# Altium PCB PCB2.PcbDoc (part 1 of 4)
Units mm, origin at the board's own origin, x right, y up, seen from the top; angles counter-clockwise.
Board outline 94 x 91 mm, 2 copper layers (Top Layer, Bottom Layer); 387 components, 398 nets, 1559 pads, 0 vias.
Unrouted connection lines stored in the file: 857.
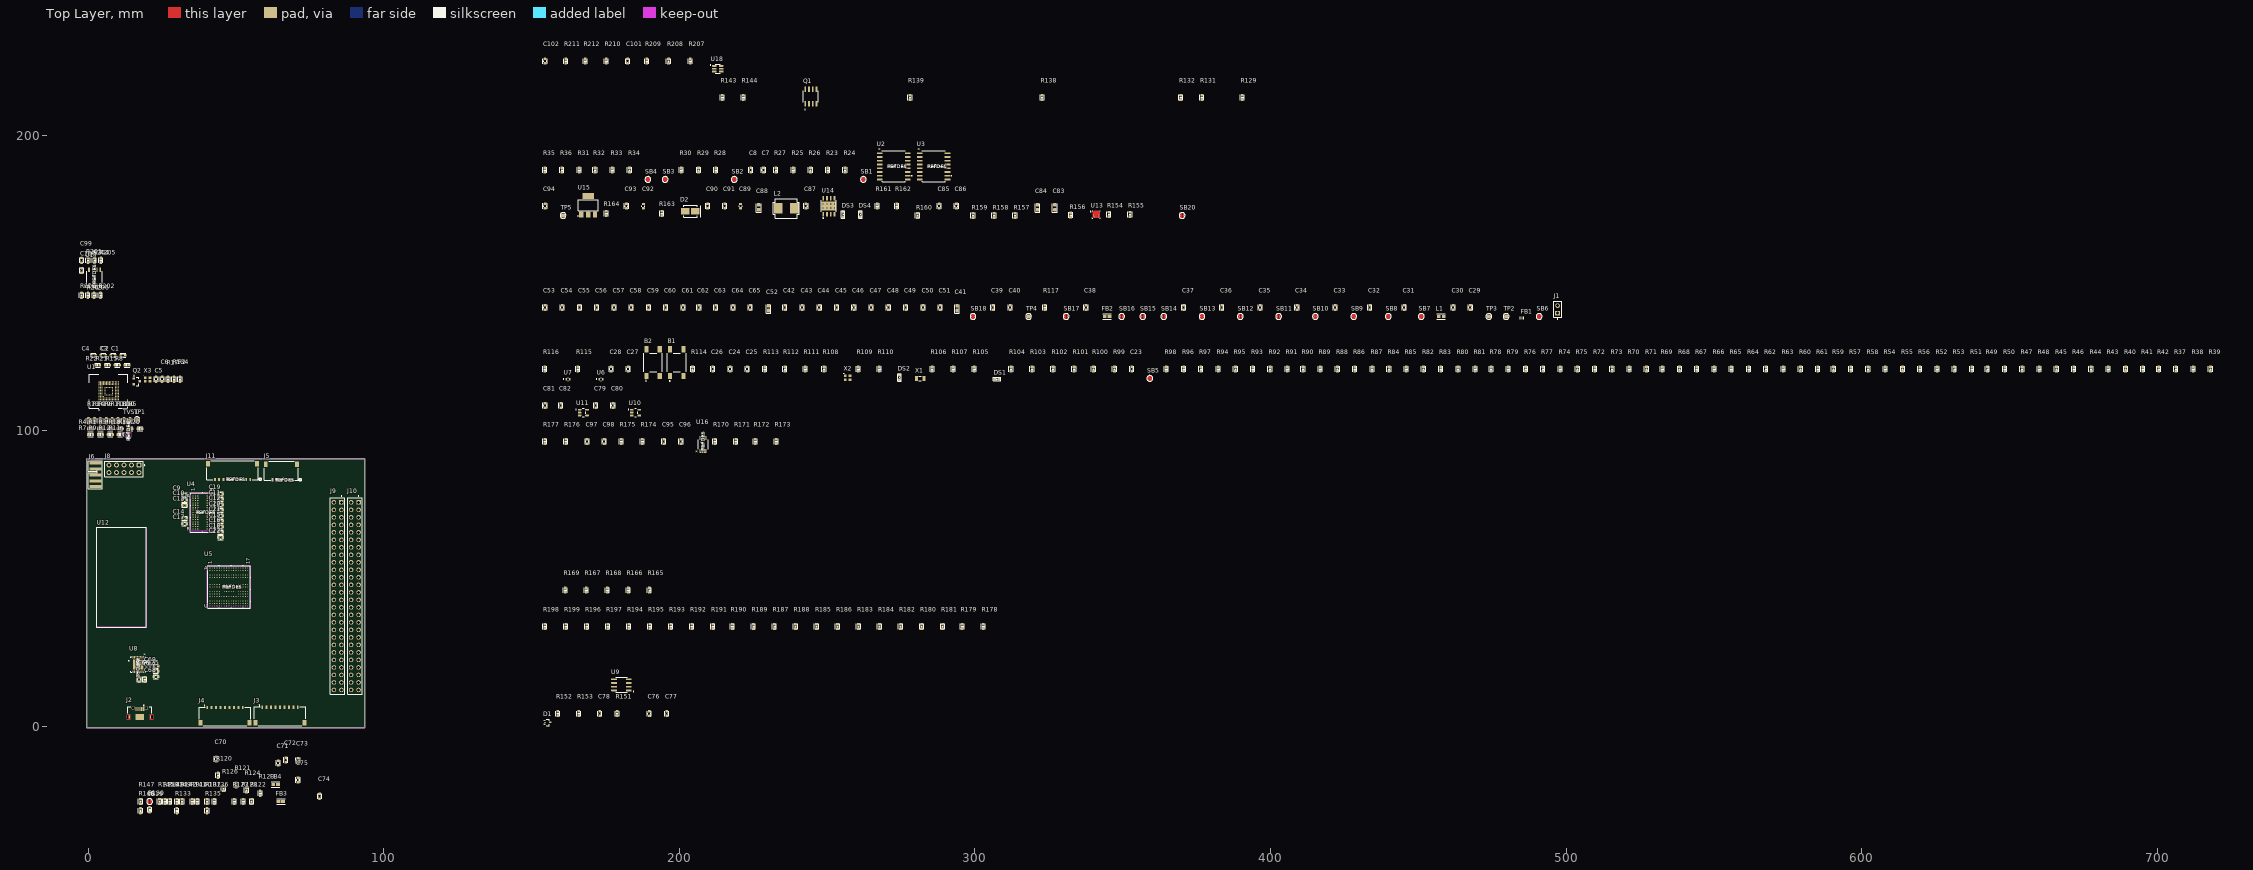
[diagram p0: Top Layer view]
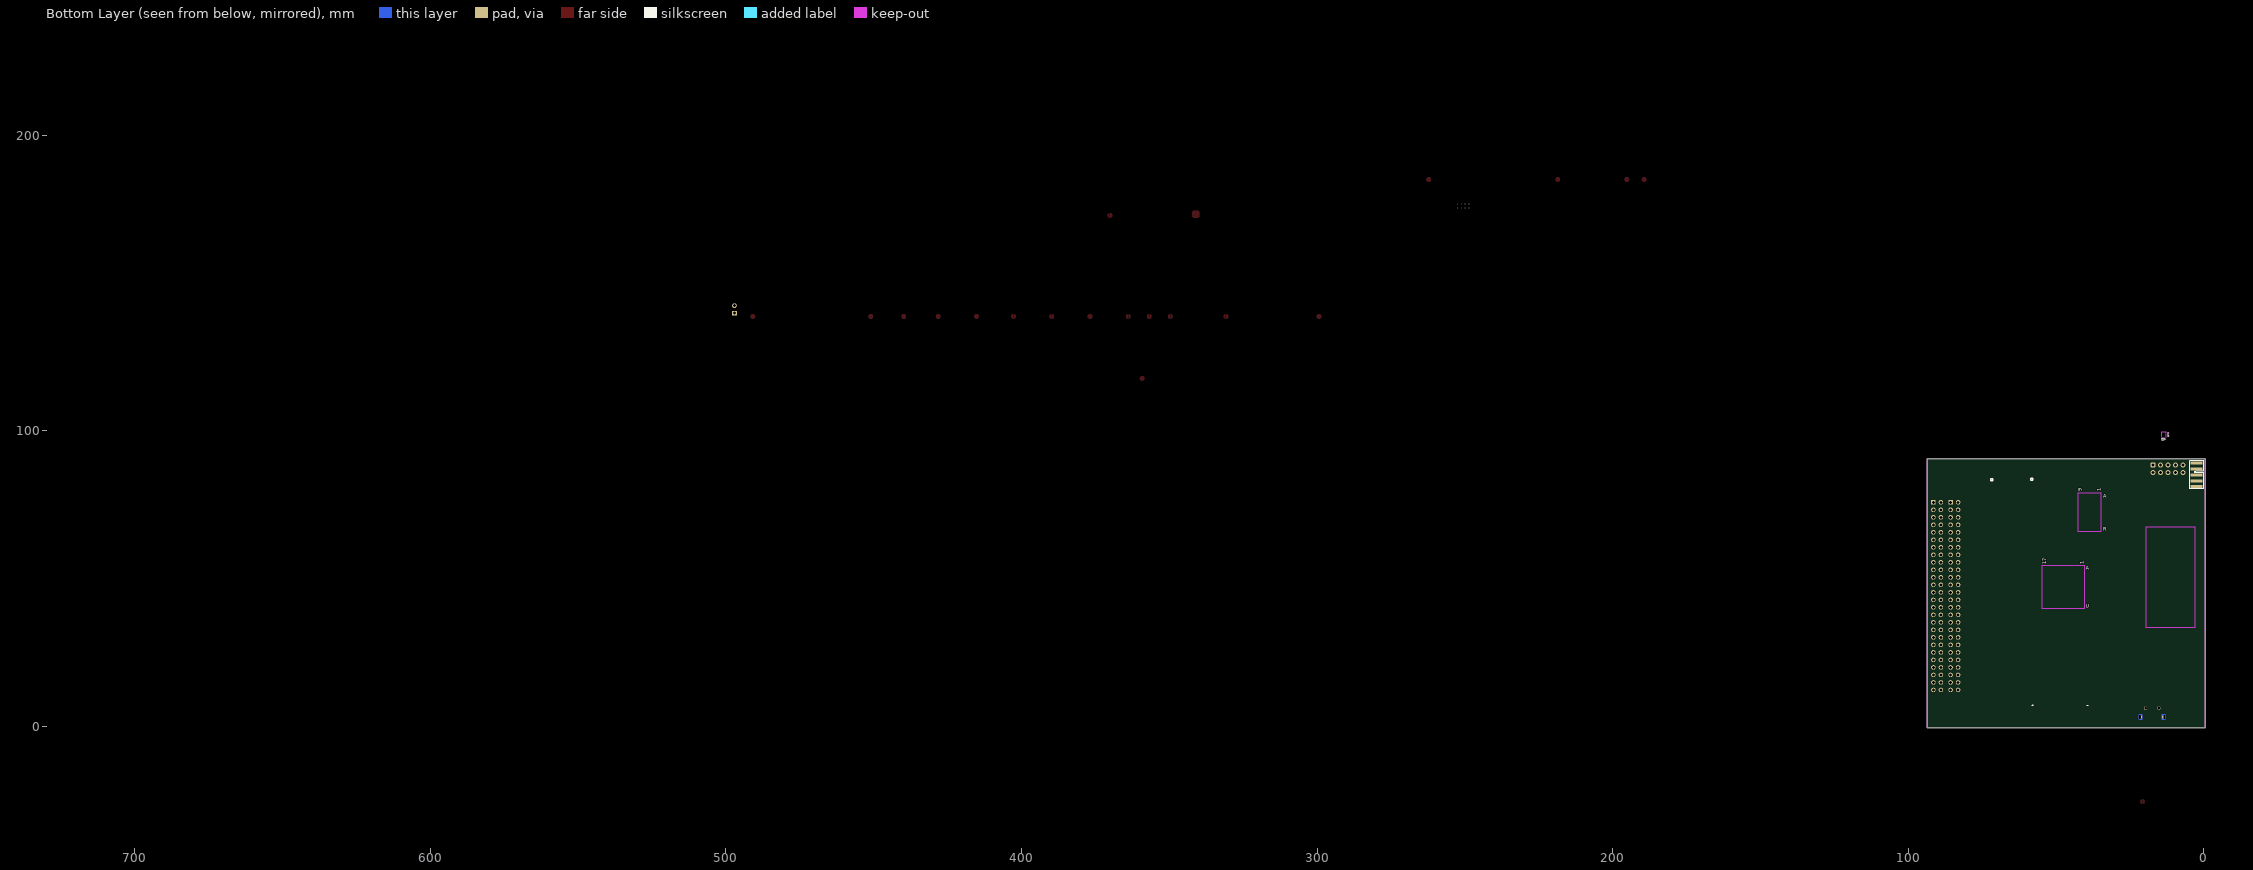
[diagram p1: Bottom Layer view, seen from below]

## Layer stack, top to bottom
Top Solder: solder mask 0.0102, Solder Resist, Dk 3.5
Top Layer: signal copper 0.0356
Dielectric 1: dielectric 0.32, FR-4, Dk 4.8
Bottom Layer: signal copper 0.0356
Bottom Solder: solder mask 0.0102, Solder Resist, Dk 3.5

## Board outline
-0.5,-0.5 -0.5,90.5 93.5,90.5 93.5,-0.5

## Design rules (kind name [scope] priority, off if disabled: settings)
Clearance [All] p1: gap=0.254 ignorepadtopadclearanceinfootprint=FALSE
DiffPairsRouting [All] p1: maxlimit=0.254 minlimit=0.254 mostfreqgap=0.254 toplayer_minwidth=0.381 toplayer_maxwidth=0.381 toplayer_prefwidth=0.381 bottomlayer_minwidth=0.381 bottomlayer_maxwidth=0.381 bottomlayer_prefwidth=0.381 maxuncoupledlength=12.7
MatchedLengths "Schematic Matched Net Lengths_21" [InNetClass('SDRAM_A[0..11]')] p1: tolerance=2.54 checknetsindiffpair=FALSE checkdiffpairvsdiffpair=TRUE checkxsignals=TRUE checkothers=TRUE
MatchedLengths "Schematic Matched Net Lengths_20" [InNetClass('SDRAM_D[0..31]')] p2: tolerance=2.54 checknetsindiffpair=FALSE checkdiffpairvsdiffpair=TRUE checkxsignals=TRUE checkothers=TRUE
MatchedLengths "Schematic Matched Net Lengths_19" [InNet('QSPI_BK1_IO3')] p3: tolerance=2.54 checknetsindiffpair=FALSE checkdiffpairvsdiffpair=TRUE checkxsignals=TRUE checkothers=TRUE
MatchedLengths "Schematic Matched Net Lengths_18" [InNet('QSPI_BK2_IO0')] p4: tolerance=2.54 checknetsindiffpair=FALSE checkdiffpairvsdiffpair=TRUE checkxsignals=TRUE checkothers=TRUE
MatchedLengths "Schematic Matched Net Lengths_17" [InNet('SDRAM_SDNCAS')] p5: tolerance=2.54 checknetsindiffpair=FALSE checkdiffpairvsdiffpair=TRUE checkxsignals=TRUE checkothers=TRUE
MatchedLengths "Schematic Matched Net Lengths_16" [InNet('QSPI_BK2_IO2')] p6: tolerance=2.54 checknetsindiffpair=FALSE checkdiffpairvsdiffpair=TRUE checkxsignals=TRUE checkothers=TRUE
MatchedLengths "Schematic Matched Net Lengths_15" [InNet('SDRAM_SDNE1')] p7: tolerance=2.54 checknetsindiffpair=FALSE checkdiffpairvsdiffpair=TRUE checkxsignals=TRUE checkothers=TRUE
MatchedLengths "Schematic Matched Net Lengths_14" [InNet('SDIO1_CMD')] p8: tolerance=2.54 checknetsindiffpair=FALSE checkdiffpairvsdiffpair=TRUE checkxsignals=TRUE checkothers=TRUE
MatchedLengths "Schematic Matched Net Lengths_13" [InNet('QSPI_BK2_IO3')] p9: tolerance=2.54 checknetsindiffpair=FALSE checkdiffpairvsdiffpair=TRUE checkxsignals=TRUE checkothers=TRUE
MatchedLengths "Schematic Matched Net Lengths_12" [InNet('QSPI_BK1_NCS')] p10: tolerance=2.54 checknetsindiffpair=FALSE checkdiffpairvsdiffpair=TRUE checkxsignals=TRUE checkothers=TRUE
MatchedLengths "Schematic Matched Net Lengths_11" [InNet('SDRAM_SDCKE1')] p11: tolerance=2.54 checknetsindiffpair=FALSE checkdiffpairvsdiffpair=TRUE checkxsignals=TRUE checkothers=TRUE
MatchedLengths "Schematic Matched Net Lengths_10" [InNet('QSPI_BK1_IO0')] p12: tolerance=2.54 checknetsindiffpair=FALSE checkdiffpairvsdiffpair=TRUE checkxsignals=TRUE checkothers=TRUE
MatchedLengths "Schematic Matched Net Lengths_9" [InNet('QSPI_BK2_NCS')] p13: tolerance=2.54 checknetsindiffpair=FALSE checkdiffpairvsdiffpair=TRUE checkxsignals=TRUE checkothers=TRUE
MatchedLengths "Schematic Matched Net Lengths_8" [InNet('SDIO1_CK')] p14: tolerance=2.54 checknetsindiffpair=FALSE checkdiffpairvsdiffpair=TRUE checkxsignals=TRUE checkothers=TRUE
MatchedLengths "Schematic Matched Net Lengths_7" [InNet('QSPI_BK1_IO2')] p15: tolerance=2.54 checknetsindiffpair=FALSE checkdiffpairvsdiffpair=TRUE checkxsignals=TRUE checkothers=TRUE
MatchedLengths "Schematic Matched Net Lengths_6" [InNet('QSPI_BK1_IO1')] p16: tolerance=2.54 checknetsindiffpair=FALSE checkdiffpairvsdiffpair=TRUE checkxsignals=TRUE checkothers=TRUE
MatchedLengths "Schematic Matched Net Lengths_5" [InNet('QSPI_CLK')] p17: tolerance=2.54 checknetsindiffpair=FALSE checkdiffpairvsdiffpair=TRUE checkxsignals=TRUE checkothers=TRUE
MatchedLengths "Schematic Matched Net Lengths_4" [InNet('SDRAM_SDNWE')] p18: tolerance=2.54 checknetsindiffpair=FALSE checkdiffpairvsdiffpair=TRUE checkxsignals=TRUE checkothers=TRUE
MatchedLengths "Schematic Matched Net Lengths_3" [InNet('SDRAM_SDCLK')] p19: tolerance=2.54 checknetsindiffpair=FALSE checkdiffpairvsdiffpair=TRUE checkxsignals=TRUE checkothers=TRUE
MatchedLengths "Schematic Matched Net Lengths_2" [InNetClass('SDIO1_D[0..7]')] p20: tolerance=2.54 checknetsindiffpair=FALSE checkdiffpairvsdiffpair=TRUE checkxsignals=TRUE checkothers=TRUE
MatchedLengths "Schematic Matched Net Lengths_1" [InNet('QSPI_BK2_IO1')] p21: tolerance=2.54 checknetsindiffpair=FALSE checkdiffpairvsdiffpair=TRUE checkxsignals=TRUE checkothers=TRUE
MatchedLengths "Schematic Matched Net Lengths" [InNet('SDRAM_SDNRAS')] p22: tolerance=2.54 checknetsindiffpair=FALSE checkdiffpairvsdiffpair=TRUE checkxsignals=TRUE checkothers=TRUE
PolygonConnect [All] p1: connectstyle=Relief reliefconductorwidth=0.254 reliefentries=4 polygonreliefangle="90 Angle" airgapwidth=0.254
RoutingVias [All] p1: holewidth=0.711 width=1.27 viastyle="Through Hole" minholewidth=0.711 minwidth=1.27 maxholewidth=0.711 maxwidth=1.27
SolderMaskExpansion [All] p1: expansion=0.102 istentingtop=FALSE
SupplyNets "Schematic Supply Nets_22" [InNet('3V3')] p1: voltage=0.000
SupplyNets "Schematic Supply Nets_21" [InNet('VBAT_BUS')] p2: voltage=0.000
SupplyNets "Schematic Supply Nets_20" [InNet('5V_SW2')] p3: voltage=0.000
SupplyNets "Schematic Supply Nets_19" [InNet('VDDA')] p4: voltage=0.000
SupplyNets "Schematic Supply Nets_18" [InNet('12V_CONN')] p5: voltage=0.000
SupplyNets "Schematic Supply Nets_17" [InNet('3V3_BUS')] p6: voltage=0.000
SupplyNets "Schematic Supply Nets_16" [InNet('3V3_SW3')] p7: voltage=0.000
SupplyNets "Schematic Supply Nets_15" [InNet('5V_SW1')] p8: voltage=0.000
SupplyNets "Schematic Supply Nets_14" [InNet('GND')] p9: voltage=0.000
SupplyNets "Schematic Supply Nets_13" [InNet('5V_BUS')] p10: voltage=0.000
SupplyNets "Schematic Supply Nets_12" [InNet('VBUS')] p11: voltage=0.000
SupplyNets "Schematic Supply Nets_11" [InNet('+1V8')] p12: voltage=0.000
SupplyNets "Schematic Supply Nets_10" [InNet('VDD_SDC')] p13: voltage=0.000
SupplyNets "Schematic Supply Nets_9" [InNet('VDD_MCU')] p14: voltage=0.000
SupplyNets "Schematic Supply Nets_8" [InNet('1V8')] p15: voltage=0.000
SupplyNets "Schematic Supply Nets_7" [InNet('3.3V')] p16: voltage=0.000
SupplyNets "Schematic Supply Nets_6" [InNet('3V3_SW1')] p17: voltage=0.000
SupplyNets "Schematic Supply Nets_4" [InNet('5V_SW3')] p18: voltage=0.000
SupplyNets "Schematic Supply Nets_3" [InNet('GND-SD')] p19: voltage=0.000
SupplyNets "Schematic Supply Nets_2" [InNet('12V')] p20: voltage=0.000
SupplyNets "Schematic Supply Nets_1" [InNet('3V3_SW2')] p21: voltage=0.000
SupplyNets "Schematic Supply Nets" [InNet('USB_VDDIO')] p22: voltage=0.000
Width [All] p1: maxlimit=0.254 minlimit=0.254 preferedwidth=0.254
29 further rules are at their usual default settings.

## Classes and differential pairs
net class ULPI_D[0..7]: ULPI_D0 ULPI_D1 ULPI_D2 ULPI_D3 ULPI_D4 ULPI_D5 ULPI_D6 ULPI_D7
net class SDRAM_D[0..31]: SDRAM_D0 SDRAM_D1 SDRAM_D2 SDRAM_D3 SDRAM_D4 SDRAM_D5 SDRAM_D6 SDRAM_D7 SDRAM_D8 SDRAM_D9 SDRAM_D10 SDRAM_D11 SDRAM_D12 SDRAM_D13 SDRAM_D14 SDRAM_D15 SDRAM_D16 SDRAM_D17 SDRAM_D18 SDRAM_D19 SDRAM_D20 SDRAM_D21 SDRAM_D22 SDRAM_D23 SDRAM_D24 SDRAM_D25 SDRAM_D26 SDRAM_D27 SDRAM_D28 SDRAM_D29 SDRAM_D30 SDRAM_D31
net class SDRAM_A[0..11]: SDRAM_A0 SDRAM_A1 SDRAM_A2 SDRAM_A3 SDRAM_A4 SDRAM_A5 SDRAM_A6 SDRAM_A7 SDRAM_A8 SDRAM_A9 SDRAM_A10 SDRAM_A11
net class SDIO1_D[0..7]: SDIO1_D0 SDIO1_D1 SDIO1_D2 SDIO1_D3 SDIO1_D4 SDIO1_D5 SDIO1_D6 SDIO1_D7
net class N000-2_[0..9]: FPGA_D0 FPGA_D1 FPGA_D2 FPGA_D3 FPGA_D4 FPGA_D5 FPGA_D6 FPGA_D7 FPGA_D8 FPGA_D9
net class N000-1_[0..4]: FPGA_STATUS0 FPGA_STATUS1 FPGA_STATUS2 FPGA_STATUS3 FPGA_STATUS4
component class WATCHDOG: C101 C102 R207 R208 R209 R210 R211 R212 U18
component class USB_OTG: C66 C67 C68 C69 C70 C71 C72 C73 C74 C75 FB3 FB4 J2 Q1 Q2 R118 R119 R120 R121 R122 R123 R124 R125 R126 R127 R128 R129 R130 R131 R132 R133 R134 R135 R136 R137 R138 R139 R140 R141 R142 R143 R144 R145 R146 R147 R148 R149 R150 SB19 TVS1 U8 X3
component class SDRAM: C9 C10 C11 C12 C13 C14 C15 C16 C17 C18 C19 C20 C21 C22 U4
component class QSPI: C7 C8 R23 R24 R25 R26 R27 R28 R29 R30 R31 R32 R33 R34 R35 R36 SB1 SB2 SB3 SB4 U2 U3
component class POWER: C83 C84 C85 C86 C87 C88 C89 C90 C91 C92 C93 C94 D2 DS3 DS4 J5 L2 R154 R155 R156 R157 R158 R159 R160 R161 R162 R163 R164 SB20 TP5 U13 U14 U15
component class MODULE_FPGA: J4 U12
component class MCU: B1 B2 C23 C24 C25 C26 C27 C28 DS1 DS2 R37 R38 R39 R40 R41 R42 R43 R44 R45 R46 R47 R48 R49 R50 R51 R52 R53 R54 R55 R56 R57 R58 R59 R60 R61 R62 R63 R64 R65 R66 R67 R68 R69 R70 R71 R72 R73 R74 R75 R76 R77 R78 R79 R80 R81 R82 R83 R84 R85 R86 R87 R88 R89 R90 R91 R92 R93 R94 R95 R96 R97 R98 R99 R100 R101 R102 R103 R104 R105 R106 R107 R108 R109 R110 R111 R112 R113 R114 R115 R116 SB5 U5 U6 U7 X1 X2
component class MCU_POWER: C29 C30 C31 C32 C33 C34 C35 C36 C37 C38 C39 C40 C41 C42 C43 C44 C45 C46 C47 C48 C49 C50 C51 C52 C53 C54 C55 C56 C57 C58 C59 C60 C61 C62 C63 C64 C65 FB1 FB2 HW1 J1 L1 R117 SB6 SB7 SB8 SB9 SB10 SB11 SB12 SB13 SB14 SB15 SB16 SB17 SB18 TP2 TP3 TP4
component class LVDS: C79 C80 C81 C82 J3 U10 U11
component class I2C: C95 C96 C97 C98 R170 R171 R172 R173 R174 R175 R176 R177 U16
component class FRAM: C99 C100 R200 R201 R202 R203 R204 R205 R206 U17
component class eMMC: C1 C2 C3 C4 C5 C6 R1 R2 R3 R4 R5 R6 R7 R8 R9 R10 R11 R12 R13 R14 R15 R16 R17 R18 R19 R20 R21 R22 TP1 U1
component class DEBUG: J6 J8 R165 R166 R167 R168 R169
component class CONNECTOR: J9 J10 R178 R179 R180 R181 R182 R183 R184 R185 R186 R187 R188 R189 R190 R191 R192 R193 R194 R195 R196 R197 R198 R199
component class CONNECT_EXP: J11
component class CAN: C76 C77 C78 D1 R151 R152 R153 U9
differential pair USB_HS: +USB_HS_P -USB_HS_N
differential pair LVDS_TxD: +LVDS_TxD_P -LVDS_TxD_N
differential pair LVDS_TxC: +LVDS_TxC_P -LVDS_TxC_N
differential pair FPGA_TxD: +FPGA_TxD_P -FPGA_TxD_N
differential pair FPGA_TxC: +FPGA_TxC_P -FPGA_TxC_N

## Components (designator, comment, footprint, x,y, rotation, side; value= is the part's Value field where it differs from the comment)
B1 "4-1437565-1" FP-4-1437565-1-MFG 199.136,123.063 r90 top
B2 "4-1437565-1" FP-4-1437565-1-MFG 191.135,123.063 r90 top
C1 "100nF/16V" CAP_C_1608X80 11.825,125.571 r0 top value=100nF
C2 "2.2uF/10V" CAP_C_1608X80 8.467,125.572 r180 top value=2.2uF
C3 "100nF/16V" CAP_C_1608X80 5.109,125.572 r180 top value=100nF
C4 "2.2uF/10V" CAP_C_1608X80 1.751,125.572 r180 top value=2.2uF
C5 "100nF/16V" CAP_C_1608X80 22.991,117.467 r90 top value=100nF
C6 "2.2uF/10V" CAP_C_1608X80 25.024,117.467 r90 top value=2.2uF
C7 "100nF/16V" CAP_C_1608X80 228.473,188.214 r90 top value=100nF
C8 "100nF/16V" CAP_C_1608X80 224.155,188.214 r90 top value=100nF
C9 "100nF/16V" CAP_C_1608X80 32.64,78.411 r0 top value=100nF
C10 "100nF/16V" CAP_C_1608X80 32.64,76.616 r0 top value=100nF
C11 "100nF/16V" CAP_C_1608X80 44.761,76.828 r180 top value=100nF
C12 "100nF/16V" CAP_C_1608X80 44.761,74.976 r180 top value=100nF
C13 "100nF/16V" CAP_C_1608X80 32.64,74.78 r0 top value=100nF
C14 "100nF/16V" CAP_C_1608X80 32.64,70.423 r0 top value=100nF
C15 "100nF/16V" CAP_C_1608X80 44.761,69.42 r180 top value=100nF
C16 "100nF/16V" CAP_C_1608X80 44.761,67.568 r180 top value=100nF
C17 "100nF/16V" CAP_C_1608X80 32.64,68.579 r0 top value=100nF
C18 "100nF/16V" CAP_C_1608X80 44.761,65.716 r180 top value=100nF
C19 "100nF/16V" CAP_C_1608X80 44.761,78.68 r180 top value=100nF
C20 "100nF/16V" CAP_C_1608X80 44.761,73.124 r180 top value=100nF
C21 "100nF/16V" CAP_C_1608X80 44.761,71.272 r180 top value=100nF
C22 "100nF/16V" CAP_C_1608X80 44.83,63.937 r180 top value=100nF
C23 "10nF/60V" CAP_C_1608X80 353.06,120.904 r90 top value=1.5pF
C24 "1.5pF/50V" CAP_C_1608X80 217.17,120.904 r90 top value=1.5pF
C25 "1.5pF/50V" CAP_C_1608X80 223.012,120.904 r90 top value=1.5pF
C26 "100nF/16V" CAP_C_1608X80 211.328,120.904 r90 top value=100nF
C27 "1.5pF/50V" CAP_C_1608X80 182.753,120.904 r90 top value=1.5pF
C28 "100nF/16V" CAP_C_1608X80 176.911,120.904 r90 top value=100nF
C29 "10uF/6V3" CAP_C_1608X80 467.614,141.732 r90 top value=10uF
C30 "220pF/16V" CAP_C_1608X80 461.772,141.732 r90 top value=220pF
C31 "10uF/6V3" CAP_C_1608X80 445.262,141.732 r90 top value=10uF
C32 "4.7uF/6V3" CAP_C_1608X80 433.578,141.732 r90 top value=4.7uF
C33 "4.7uF/6V3" CAP_C_1608X80 421.894,141.732 r90 top value=4.7uF
C34 "4.7uF/6V3" CAP_C_1608X80 408.94,141.732 r90 top value=4.7uF
C35 "2.2uF/10V" CAP_C_1608X80 396.494,141.732 r90 top value=2.2uF
C36 "2.2uF/10V" CAP_C_1608X80 383.54,141.732 r90 top value=2.2uF
C37 "2.2uF/10V" CAP_C_1608X80 370.586,141.732 r90 top value=2.2uF
C38 "1uF/16V" CAP_C_1608X80 337.566,141.732 r90 top value=1uF
C39 "2.2uF/10V" CAP_C_1608X80 306.07,141.732 r90 top value=2.2uF
C40 "100nF/16V" CAP_C_1608X80 311.912,141.732 r90 top value=100nF
C41 "4.7uF/16V" CAP_MP_2012X170 293.878,141.478 r90 top value=4.7uF
C42 "100nF/16V" CAP_C_1608X80 235.712,141.732 r90 top value=100nF
C43 "100nF/16V" CAP_C_1608X80 241.554,141.732 r90 top value=100nF
C44 "100nF/16V" CAP_C_1608X80 247.396,141.732 r90 top value=100nF
C45 "100nF/16V" CAP_C_1608X80 253.238,141.732 r90 top value=100nF
C46 "100nF/16V" CAP_C_1608X80 259.08,141.732 r90 top value=100nF
C47 "100nF/16V" CAP_C_1608X80 264.922,141.732 r90 top value=100nF
C48 "100nF/16V" CAP_C_1608X80 270.764,141.732 r90 top value=100nF
C49 "100nF/16V" CAP_C_1608X80 276.606,141.732 r90 top value=100nF
C50 "100nF/16V" CAP_C_1608X80 282.448,141.732 r90 top value=100nF
C51 "100nF/16V" CAP_C_1608X80 288.29,141.732 r90 top value=100nF
C52 "1uF/35V" CAP_MP_2012X170 230.124,141.478 r90 top value=1uF
C53 "100nF/16V" CAP_C_1608X80 154.559,141.732 r90 top value=100nF
C54 "100nF/16V" CAP_C_1608X80 160.401,141.732 r90 top value=100nF
C55 "100nF/16V" CAP_C_1608X80 166.243,141.732 r90 top value=100nF
C56 "100nF/16V" CAP_C_1608X80 172.085,141.732 r90 top value=100nF
C57 "100nF/16V" CAP_C_1608X80 177.927,141.732 r90 top value=100nF
C58 "100nF/16V" CAP_C_1608X80 183.769,141.732 r90 top value=100nF
C59 "100nF/16V" CAP_C_1608X80 189.611,141.732 r90 top value=100nF
C60 "100nF/16V" CAP_C_1608X80 195.453,141.732 r90 top value=100nF
C61 "100nF/16V" CAP_C_1608X80 201.295,141.732 r90 top value=100nF
C62 "100nF/16V" CAP_C_1608X80 206.629,141.732 r90 top value=100nF
C63 "10uF/25V" CAP_C_1608X80 212.344,141.732 r90 top value=10uF
C64 "100nF/16V" CAP_C_1608X80 218.186,141.732 r90 top value=100nF
C65 "100nF/16V" CAP_C_1608X80 224.028,141.732 r90 top value=100nF
C66 "100nF/16V" CAP_C_1608X80 17.248,15.901 r90 top value=100nF
C67 "100nF/16V" CAP_C_1608X80 22.9,18.626 r0 top value=100nF
C68 "2.2uF/10V" CAP_C_1608X80 22.9,16.847 r180 top value=2.2uF
C69 "100nF/16V" CAP_C_1608X80 22.899,20.405 r0 top value=100nF
C70 "100nF/16V" CAP_C_1608X80 43.3,-11 r90 top value=100nF
C71 "100nF/16V" CAP_C_1608X80 64.3,-12.4 r90 top value=100nF
C72 "100nF/16V" CAP_C_1608X80 66.9,-11.3 r90 top value=100nF
C73 "100nF/16V" CAP_C_1608X80 71,-11.5 r90 top value=100nF
C74 "100nF/16V" CAP_C_1608X80 78.3,-23.6 r90 top value=100nF
C75 "100nF/16V" CAP_C_1608X80 71,-18.1 r90 top value=100nF
C76 "100nF/16V" CAP_C_1608X80 189.865,4.318 r90 top value=100nF
C77 "100nF/16V" CAP_C_1608X80 195.707,4.318 r90 top value=100nF
C78 "4.7nF/16V" CAP_C_1608X80 173.101,4.318 r90 top value=100nF
C79 "10uF/16V" CAP_C_1608X80 171.704,108.585 r90 top value=33pF
C80 "1uF/16V" CAP_C_1608X80 177.546,108.585 r90 top value=33pF
C81 "10uF/16V" CAP_C_1608X80 154.559,108.585 r90 top value=33pF
C82 "1uF/16V" CAP_C_1608X80 159.893,108.585 r90 top value=33pF
C83 "33uF/16V" CAP_MP_2012X170 327.025,175.641 r90 top value=33uF
C84 "33uF/16V" CAP_MP_2012X170 321.183,175.641 r90 top value=33uF
C85 "2.2nF/25V" CAP_C_1608X80 287.909,176.022 r90 top
C86 "2.2nF/25V" CAP_C_1608X80 293.751,176.022 r90 top
C87 "0.01uF/16V" CAP_C_1608X80 242.824,176.022 r90 top value=33pF
C88 "33uF/16V" CAP_MP_2012X170 226.822,175.641 r90 top value=33uF
C89 "0.22uF/16V" CAP_C_1608X80_L 220.726,176.022 r90 top value=33pF
C90 "0.22uF/10V" CAP_C_1608X80 209.55,176.022 r90 top value=33pF
C91 "0.22uF/10V" CAP_C_1608X80 215.392,176.022 r90 top value=33pF
C92 "0.22uF/16V" CAP_C_1608X80_L 187.833,176.022 r90 top value=33pF
C93 "0.22uF/10V" CAP_C_1608X80 182.118,176.022 r90 top value=33pF
C94 "10uF/25V" CAP_C_1608X80 154.559,176.022 r90 top value=10uF
C95 "1uF/16V" CAP_C_1608X80 194.691,96.393 r90 top value=33pF
C96 "0.22uF" CAP_C_1608X80 200.533,96.393 r90 top value=33pF
C97 "1uF/16V" CAP_C_1608X80 168.783,96.393 r90 top value=33pF
C98 "0.22uF" CAP_C_1608X80 174.625,96.393 r90 top value=33pF
C99 "0.22uF/10V" CAP_C_1608X80 -2.209,157.696 r90 top value=33pF
C100 "0.22uF/10V" CAP_C_1608X80 -2.2,154.2 r90 top value=33pF
C101 "220nF/10V" CAP_C_1608X80 182.499,225.044 r90 top value=33pF
C102 "220nF/10V" CAP_C_1608X80 154.559,225.044 r90 top value=33pF
D1 "ESDCAN02-2BWY" FP-SOT323-3L-MFG 155.321,1.397 r0 top value=3pF
D2 "SS54B" JCET-SMB-2_M 203.708,174.244 r0 top
DS1 "LED_green" LED-0603-GREEN 307.467,117.475 r0 top value=GREEN
DS2 "LED_red" LED-0603-RED 274.447,118.11 r90 top value=RED
DS3 "LED_red" LED-0603-RED 255.397,173.228 r90 top value=RED
DS4 "LED_green" LED-0603-GREEN 261.239,173.228 r90 top value=GREEN
FB1 "BLM03PG330SN1D" FP-BLM03-0_03-d0_3-IPC_C 485.013,138.176 r90 top
FB2 "BLM18KG601SN1D" FP-BLM18-0_15-t0_8-IPC_A 344.678,138.684 r0 top
FB3 "BLM18PG121SN1D" FP-BLM18-0_15-t0_8-IPC_A 65.2,-25.4 r0 top
FB4 "BLM18PG121SN1D" FP-BLM18-0_15-t0_8-IPC_A 63.4,-19.6 r0 top
J1 "TSW-102-07-G-S" FP-TSW-102-07-G-S-MFG 497.078,141.097 r90 top
J2 "47590-0001" FP-47590-0001-MFG 17.5,3.4 r0 top
J3 "5040500991" 5040500991 64.905,3.448 r180 top
J4 "5040500991" 5040500991 46.3,3.4 r180 top
J5 "5040500591" CONN_5040500591_MOL 65.4,86.5 r0 top
J6 "009159010061911" 009159010061911 2.5,81.1 r90 top
J8 "61301021121" 61301021121 12.129,87.148 r180 top
J9 "ESQ-126-14-G-D" ESQ-126-14-G-D 84.4,44.09 r90 top
J10 "ESQ-126-14-G-D" ESQ-126-14-G-D 90.23,44.09 r90 top
J11 "5040500991" CONN_5040500991_MOL 48.843,86.643 r0 top
L1 "2.2uH" FP-MLZ1608-IPC_A 457.708,138.684 r0 top
L2 "inductor" SRP7050TA-220M 236.22,175.26 r0 top
Q1 "STS5PF30L" SOIC127P600X175-8N 244.475,213.106 r90 top
Q2 "MMBTA42LT1G" ONSC-SOT-23-3-318-08_V 16.487,116.742 r0 top
R1 "47K" RES_C_1608X60 4.137,100.726 r180 top
R2 "47K" RES_C_1608X60 31.06,117.467 r270 top
R3 "47K" RES_C_1608X60 7.495,100.726 r180 top
R4 "47K" RES_C_1608X60 0.779,100.726 r180 top
R5 "47K" RES_C_1608X60 14.16,103.409 r270 top
R6 "47K" RES_C_1608X60 6.128,103.409 r270 top
R7 "47K" RES_C_1608X60 0.779,98.718 r180 top
R8 "47K" RES_C_1608X60 13.201,122.226 r180 top
R9 "22R" RES_C_1608X60 4.137,98.718 r0 top
R10 "22R" RES_C_1608X60 12.152,103.409 r90 top
R11 "22R" RES_C_1608X60 10.853,98.718 r0 top
R12 "22R" RES_C_1608X60 7.495,98.718 r180 top
R13 "22R" RES_C_1608X60 0.104,103.409 r90 top
R14 "22R" RES_C_1608X60 2.112,103.409 r90 top
R15 "22R" RES_C_1608X60 9.843,122.226 r0 top
R16 "22R" RES_C_1608X60 14.211,100.726 r0 top
R17 "47K" RES_C_1608X60 27.044,117.467 r270 top
R18 "10K" RES_C_1608X60 10.853,100.726 r0 top
R19 "0R" RES_C_1608X60 4.12,103.409 r90 top
R20 "22R" RES_C_1608X60 17.569,100.726 r0 top
R21 "22R" RES_C_1608X60 6.485,122.226 r180 top
R22 "47K" RES_C_1608X60 3.127,122.226 r180 top
R23 "33R" RES_C_1608X60 250.19,188.214 r90 top
R24 "33R" RES_C_1608X60 256.032,188.214 r90 top
R25 "33R" RES_C_1608X60 238.506,188.214 r90 top
R26 "33R" RES_C_1608X60 244.348,188.214 r90 top
R27 "33R" RES_C_1608X60 232.664,188.214 r90 top
R28 "33R" RES_C_1608X60 212.344,188.214 r90 top
R29 "33R" RES_C_1608X60 206.502,188.214 r90 top
R30 "33R" RES_C_1608X60 200.66,188.214 r90 top
R31 "33R" RES_C_1608X60 166.116,188.214 r90 top
R32 "33R" RES_C_1608X60 171.45,188.214 r90 top
R33 "33R" RES_C_1608X60 177.292,188.214 r90 top
R34 "33R" RES_C_1608X60 183.134,188.214 r90 top
R35 "10K" RES_C_1608X60 154.432,188.214 r90 top
R36 "10K" RES_C_1608X60 160.274,188.214 r90 top
R37 "Resistor" RES_C_1608X60 706.247,120.904 r90 top value=33R
R38 "33R" RES_C_1608X60 712.089,120.904 r90 top
R39 "33R" RES_C_1608X60 717.931,120.904 r90 top
R40 "Resistor" RES_C_1608X60 689.229,120.904 r90 top value=33R
R41 "33R" RES_C_1608X60 695.071,120.904 r90 top
R42 "33R" RES_C_1608X60 700.405,120.904 r90 top
R43 "33R" RES_C_1608X60 683.387,120.904 r90 top
R44 "33R" RES_C_1608X60 677.545,120.904 r90 top
R45 "33R" RES_C_1608X60 665.861,120.904 r90 top
R46 "33R" RES_C_1608X60 671.703,120.904 r90 top
R47 "33R" RES_C_1608X60 654.177,120.904 r90 top
R48 "33R" RES_C_1608X60 660.019,120.904 r90 top
R49 "33R" RES_C_1608X60 642.493,120.904 r90 top
R50 "33R" RES_C_1608X60 648.335,120.904 r90 top
R51 "33R" RES_C_1608X60 637.159,120.904 r90 top
R52 "Resistor" RES_C_1608X60 625.475,120.904 r90 top value=33R
R53 "33R" RES_C_1608X60 631.317,120.904 r90 top
R54 "Resistor" RES_C_1608X60 607.949,120.904 r90 top value=33R
R55 "33R" RES_C_1608X60 613.791,120.904 r90 top
R56 "33R" RES_C_1608X60 619.633,120.904 r90 top
R57 "Resistor" RES_C_1608X60 596.265,120.904 r90 top value=33R
R58 "33R" RES_C_1608X60 602.107,120.904 r90 top
R59 "Resistor" RES_C_1608X60 590.423,120.904 r90 top value=33R
R60 "Resistor" RES_C_1608X60 579.247,120.904 r90 top value=33R
R61 "33R" RES_C_1608X60 585.089,120.904 r90 top
R62 "Resistor" RES_C_1608X60 567.563,120.904 r90 top value=33R
R63 "33R" RES_C_1608X60 573.405,120.904 r90 top
R64 "Resistor" RES_C_1608X60 561.721,120.904 r90 top value=33R
R65 "Resistor" RES_C_1608X60 555.879,120.904 r90 top value=33R
R66 "33R" RES_C_1608X60 550.037,120.904 r90 top
R67 "33R" RES_C_1608X60 544.195,120.904 r90 top
R68 "33R" RES_C_1608X60 538.353,120.904 r90 top
R69 "33R" RES_C_1608X60 532.511,120.904 r90 top
R70 "Resistor" RES_C_1608X60 521.335,120.904 r90 top value=33R
R71 "33R" RES_C_1608X60 527.177,120.904 r90 top
R72 "Resistor" RES_C_1608X60 509.651,120.904 r90 top value=33R
R73 "33R" RES_C_1608X60 515.493,120.904 r90 top
R74 "Resistor" RES_C_1608X60 497.967,120.904 r90 top value=33R
R75 "33R" RES_C_1608X60 503.809,120.904 r90 top
R76 "Resistor" RES_C_1608X60 486.283,120.904 r90 top value=33R
R77 "33R" RES_C_1608X60 492.125,120.904 r90 top
R78 "Resistor" RES_C_1608X60 474.599,120.904 r90 top value=33R
R79 "33R" RES_C_1608X60 480.441,120.904 r90 top
R80 "Resistor" RES_C_1608X60 463.423,120.904 r90 top value=33R
R81 "33R" RES_C_1608X60 469.265,120.904 r90 top
R82 "Resistor" RES_C_1608X60 451.739,120.904 r90 top value=33R
R83 "33R" RES_C_1608X60 457.581,120.904 r90 top
R84 "Resistor" RES_C_1608X60 440.055,120.904 r90 top value=33R
R85 "33R" RES_C_1608X60 445.897,120.904 r90 top
R86 "Resistor" RES_C_1608X60 428.498,120.904 r90 top value=33R
R87 "33R" RES_C_1608X60 434.34,120.904 r90 top
R88 "Resistor" RES_C_1608X60 422.656,120.904 r90 top value=33R
R89 "Resistor" RES_C_1608X60 416.814,120.904 r90 top value=33R
R90 "Resistor" RES_C_1608X60 410.972,120.904 r90 top value=33R
R91 "Resistor" RES_C_1608X60 405.638,120.904 r90 top value=33R
R92 "Resistor" RES_C_1608X60 399.796,120.904 r90 top value=33R
R93 "Resistor" RES_C_1608X60 393.954,120.904 r90 top value=33R
R94 "Resistor" RES_C_1608X60 382.27,120.904 r90 top value=33R
R95 "1K" RES_C_1608X60 388.112,120.904 r90 top
R96 "Resistor" RES_C_1608X60 370.586,120.904 r90 top value=33R
R97 "51R" RES_C_1608X60 376.428,120.904 r90 top
R98 "Resistor" RES_C_1608X60 364.744,120.904 r90 top value=33R
R99 "Resistor" RES_C_1608X60 347.218,120.904 r90 top value=33R
R100 "Resistor" RES_C_1608X60 340.106,120.904 r90 top value=33R
R101 "Resistor" RES_C_1608X60 333.502,120.904 r90 top value=33R
R102 "Resistor" RES_C_1608X60 326.39,120.904 r90 top value=33R
R103 "Resistor" RES_C_1608X60 319.278,120.904 r90 top value=33R
R104 "Resistor" RES_C_1608X60 312.166,120.904 r90 top value=33R
R105 "1k" RES_C_1608X60 299.72,120.904 r90 top
R106 "0R" RES_C_1608X60 285.496,120.904 r90 top
R107 "0R" RES_C_1608X60 292.608,120.904 r90 top
R108 "1k" RES_C_1608X60 248.92,120.904 r90 top
R109 "10K" RES_C_1608X60 260.477,120.904 r90 top
R110 "10K" RES_C_1608X60 267.589,120.904 r90 top
R111 "10K" RES_C_1608X60 242.57,120.904 r90 top
R112 "10K" RES_C_1608X60 235.712,120.904 r90 top
R113 "10K" RES_C_1608X60 228.854,120.904 r90 top
R114 "100R" RES_C_1608X60 204.47,120.904 r90 top
R115 "330R" RES_C_1608X60 165.608,120.904 r90 top
R116 "220K" RES_C_1608X60 154.432,120.904 r90 top
R117 "Resistor" RES_C_1608X60 323.596,141.732 r90 top value=0R
R118 "0R" RES_C_1608X60 8.136,103.409 r90 top
R119 "0R" RES_C_1608X60 10.144,103.409 r90 top
R120 "0R" RES_C_1608X60 43.9,-16.5 r90 top
R121 "0R" RES_C_1608X60 50.046,-19.773 r90 top value=1K
R122 "0R" RES_C_1608X60 55.3,-25.4 r90 top value=1K
R123 "0R" RES_C_1608X60 58.2,-22.6 r90 top value=1K
R124 "33R" RES_C_1608X60 53.554,-21.511 r90 top value=1K
R125 "8K06" RES_C_1608X60 19.111,15.902 r270 top
R126 "820R" RES_C_1608X60 45.8,-21 r90 top value=1K
R127 "0" RES_C_1608X60 49.4,-25.4 r90 top value=1K
R128 "0" RES_C_1608X60 52.5,-25.4 r90 top value=1K
R129 "0" RES_C_1608X60 390.398,212.725 r90 top value=1K
R130 "0" RES_C_1608X60 20.8,-28.179 r90 top value=1K
R131 "0" RES_C_1608X60 376.682,212.725 r90 top value=1K
R132 "0" RES_C_1608X60 369.57,212.725 r90 top value=1K
R133 "0" RES_C_1608X60 30,-28.504 r90 top value=1K
R134 "0" RES_C_1608X60 29.052,117.467 r90 top value=1K
R135 "51R" RES_C_1608X60 40.2,-28.504 r90 top value=1K
R136 "10K" RES_C_1608X60 42.7,-25.4 r90 top value=1K
R137 "0R" RES_C_1608X60 40.2,-25.4 r90 top value=1K
R138 "4K7" RES_C_1608X60 322.707,212.725 r90 top value=1K
R139 "100K" RES_C_1608X60 278.003,212.725 r90 top value=1K
R140 "[N/A]" RES_C_1608X60 36.954,-25.4 r90 top value=1K
R141 "1K" RES_C_1608X60 35.2,-25.4 r90 top
R142 "0R" RES_C_1608X60 31.754,-25.4 r90 top value=1K
R143 "0R" RES_C_1608X60 214.503,212.725 r90 top value=1K
R144 "0R" RES_C_1608X60 221.615,212.725 r90 top value=1K
R145 "0" RES_C_1608X60 24.146,-25.4 r90 top value=1K
R146 "0R" RES_C_1608X60 17.7,-28.504 r90 top value=1K
R147 "0R" RES_C_1608X60 17.7,-25.4 r90 top value=1K
R148 "0R" RES_C_1608X60 27.654,-25.4 r90 top value=1K
R149 "10K" RES_C_1608X60 30,-25.4 r90 top value=1K
R150 "10K" RES_C_1608X60 25.9,-25.4 r90 top value=1K
R151 "60R" RES_C_1608X60 178.943,4.318 r90 top value=1K
R152 "60R" RES_C_1608X60 158.877,4.318 r90 top value=1K
R153 "10K" RES_C_1608X60 165.989,4.318 r90 top value=1K
R154 "10k" RES_C_1608X60 345.313,173.228 r90 top
R155 "10k" RES_C_1608X60 352.425,173.228 r90 top
R156 "470k" RES_C_1608X60 332.359,172.974 r90 top
R157 "51R" RES_C_1608X60 313.563,172.847 r90 top value=22R
R158 "11k" RES_C_1608X60 306.451,172.847 r90 top
R159 "47k" RES_C_1608X60 299.339,172.847 r90 top
R160 "3.3k" RES_C_1608X60 280.543,172.847 r90 top
R161 "4.7k" RES_C_1608X60 266.954,176.022 r90 top
R162 "1k" RES_C_1608X60 273.558,176.022 r90 top
R163 "10k" RES_C_1608X60 194.056,173.482 r90 top
R164 "5.9k" RES_C_1608X60 175.26,173.482 r90 top
R165 "22R" RES_C_1608X60 189.865,46.101 r90 top
R166 "22R" RES_C_1608X60 182.753,46.101 r90 top
R167 "22R" RES_C_1608X60 168.529,46.101 r90 top
R168 "22R" RES_C_1608X60 175.641,46.101 r90 top
R169 "22R" RES_C_1608X60 161.417,46.101 r90 top
R170 "4.7 KOhm" RES_C_1608X60 211.963,96.393 r90 top
R171 "4.7 KOhm" RES_C_1608X60 219.075,96.393 r90 top
R172 "4.7 KOhm" RES_C_1608X60 225.679,96.393 r90 top
R173 "4.7 KOhm" RES_C_1608X60 232.791,96.393 r90 top
R174 "22R" RES_C_1608X60 187.452,96.393 r90 top
R175 "22R" RES_C_1608X60 180.34,96.393 r90 top
R176 "22R" RES_C_1608X60 161.544,96.393 r90 top
R177 "10 KOhm" RES_C_1608X60 154.432,96.393 r90 top
R178 "22R" RES_C_1608X60 302.768,33.782 r90 top
R179 "22R" RES_C_1608X60 295.656,33.782 r90 top
R180 "22R" RES_C_1608X60 281.94,33.782 r90 top
R181 "22R" RES_C_1608X60 289.052,33.782 r90 top
R182 "22R" RES_C_1608X60 274.828,33.782 r90 top
R183 "22R" RES_C_1608X60 260.604,33.782 r90 top
R184 "22R" RES_C_1608X60 267.716,33.782 r90 top
R185 "22R" RES_C_1608X60 246.38,33.782 r90 top
R186 "22R" RES_C_1608X60 253.492,33.782 r90 top
R187 "22R" RES_C_1608X60 232.156,33.782 r90 top
R188 "22R" RES_C_1608X60 239.268,33.782 r90 top
R189 "22R" RES_C_1608X60 225.044,33.782 r90 top
R190 "22R" RES_C_1608X60 217.932,33.782 r90 top
R191 "22R" RES_C_1608X60 211.328,33.782 r90 top
R192 "22R" RES_C_1608X60 204.216,33.782 r90 top
R193 "0R" RES_C_1608X60 197.104,33.782 r90 top
R194 "22R" RES_C_1608X60 182.88,33.782 r90 top
R195 "0R" RES_C_1608X60 189.992,33.782 r90 top
R196 "0R" RES_C_1608X60 168.656,33.782 r90 top
R197 "0R" RES_C_1608X60 175.768,33.782 r90 top
R198 "0R" RES_C_1608X60 154.432,33.782 r90 top
R199 "0R" RES_C_1608X60 161.544,33.782 r90 top
R200 "4.7k" RES_C_1608X60 -2.222,145.869 r270 top
R201 "4.7k" RES_C_1608X60 -0.048,157.696 r90 top
R202 "4.7k" RES_C_1608X60 4.15,145.869 r270 top
R203 "22R" RES_C_1608X60 -0.098,145.869 r90 top
R204 "22R" RES_C_1608X60 2.126,157.696 r270 top
R205 "22R" RES_C_1608X60 4.3,157.696 r270 top
R206 "22R" RES_C_1608X60 2.026,145.869 r90 top
R207 "22R" RES_C_1608X60 203.708,225.044 r90 top
R208 "0R" RES_C_1608X60 196.342,225.044 r90 top
R209 "22R" RES_C_1608X60 188.976,225.044 r90 top
R210 "22R" RES_C_1608X60 175.26,225.044 r90 top
R211 "16.5K" RES_C_1608X60 161.544,225.044 r90 top
R212 "16.5K" RES_C_1608X60 168.148,225.044 r90 top
SB1 "SB_ON" Jump2 262.255,185.039 r0 top value=0R
SB2 "SB_OFF" Jump2 218.567,185.039 r0 top value=0R
SB3 "SB_OFF" Jump2 195.199,185.039 r0 top value=0R
SB4 "SB_ON" Jump2 189.357,185.039 r0 top value=0R
SB5 "SB_OFF" Jump2 359.156,117.729 r0 top value=0R
SB6 "SB_ON" Jump2 490.855,138.684 r0 top value=0R
SB7 "SB_ON" Jump2 450.977,138.684 r0 top value=0R
SB8 "SB_OFF" Jump2 439.801,138.684 r0 top value=0R
SB9 "SB_ON" Jump2 428.117,138.684 r0 top value=0R
SB10 "SB_ON" Jump2 415.163,138.684 r90 top value=0R
SB11 "SB_OFF" Jump2 402.717,138.684 r90 top value=0R
SB12 "SB_OFF" Jump2 389.763,138.684 r90 top value=0R
SB13 "SB_OFF" Jump2 376.809,138.684 r90 top value=0R
SB14 "SB_ON" Jump2 363.855,138.684 r90 top value=0R
SB15 "SB_OFF" Jump2 356.743,138.684 r90 top value=0R
SB16 "SB_ON" Jump2 349.631,138.684 r90 top value=0R
SB17 "SB_ON" Jump2 330.835,138.684 r90 top value=0R
SB18 "SB_ON" Jump2 299.339,138.684 r90 top value=0R
SB19 "SB_OFF" Jump2 20.8,-25.4 r90 top value=0R
SB20 "Solder Bridge OFF" Jump2 370.078,172.847 r90 top
TP1 "Test Point" TESTPOINT 16.518,103.734 r90 top value=N/A
TP2 "Test Point" TESTPOINT 479.679,138.684 r0 top value=N/A
TP3 "Test Point" TESTPOINT 473.837,138.684 r0 top value=N/A
TP4 "Test Point" TESTPOINT 318.135,138.684 r0 top value=N/A
TP5 "Test Point" TESTPOINT 160.655,172.847 r0 top value=N/A
TVS1 "USBULC6-2F3" FLIPCHIP4_USBUL_STM 13.535,98.719 r90 top
U1 "eMMC_THGBMTG5D1LBAIL" BGA153N50P14X14_1300X1150X80N 6.95,113.35 r90 top value=THGBMTG5D1LBAIL
U2 "" SOP2-16_7P5X10P3_MRN 272.542,189.484 r0 top value=MT25QL512ABB8ESF-0SIT
U3 "" SOP2-16_7P5X10P3_MRN 286.004,189.484 r0 top value=MT25QL512ABB8ESF-0SIT
U4 "IS42S32400F-6BL" TFBGA-90_8X13_ISI 38.7,72.4 r0 top value=IS42S32400J-6BL
U5 "" TFBGA240+25 47.6,47.2 r0 top value=STM32H745XIH6
U6 "ESD-TRANSIL" TVS_ESDA7P60-1U1M 173.482,117.475 r0 top value=ESDA7P60-1U1M
U7 "ESD-TRANSIL" TVS_ESDA7P60-1U1M 162.306,117.475 r0 top value=ESDA7P60-1U1M
U8 "USB3320C-EZK" QFN32_5X5MC_MCH 16.951,20.946 r270 top
U9 "SN65HVD230DR" "SOIC127P599X175-8N - duplicate" 180.41,14.097 r180 top
U10 "DS90LV011AQ-Q1" DS90LV011AQ-Q1 185.166,106.172 r0 top
U11 "DS90LV011AQ-Q1" DS90LV011AQ-Q1 167.513,106.172 r0 top
U12 "Module_FPGA_V1" MODULE_FPGA 11.256,41.904 r90 top
U13 "TPS259470ARPWR" IC_TPS25974ARPWR 340.995,173.228 r0 top
U14 "TPS5430DDAR" CONV_TPS5430DDAR 250.571,176.022 r90 top
U15 "" SOT230P700X180-4N 169.164,176.276 r0 top value=LD1117S18TR
U16 "PCA9508DP,118" TSSOP8_SOT505-1_NXP 208.026,95.377 r90 top
U17 "IS66WVS4M8BLL-104NLI" SOIC8_150MIL_N_ISI 2.186,151.807 r90 top
U18 "TPL5010DDCR" TPL5010DDCR 212.979,222.504 r0 top
X1 "NX3215SA-32.768K-STD-MUS-2" FP-NX3215SA-MFG 281.432,117.729 r0 top
X2 "Oscillator_4pins" NZ2520SH-24M 256.921,117.983 r0 top value=25MHz
X3 "NZ2520SH-24M" NZ2520SH-24M 20.145,117.342 r0 top

## Footprints (in the part's own frame and the unit in brackets; to place one, negate y for a bottom-side part, rotate by r counter-clockwise, add the part's x,y. Pads: shape width x height; smd on the part's side, far side on the other; paste and mask are expansions set on the pad)
5040500991 [mil]
  rect 26x41 smd: 1(236.22,-119.76) 2(177.17,-119.76) 3(118.11,-119.76) 4(59.06,-119.76) 5(0,-119.76) 6(-59.06,-119.76) 7(-118.11,-119.76) 8(-177.17,-119.76) 9(-236.22,-119.76)
  rect 51x73 smd: 10(-326.97,84.57) 11(326.97,84.57)
  silkscreen extent -344,-150 344,125, body extent -354,-129 357,124, height 79
61301021121 [mm] "Pin Header, pitch 2.54 mm, THT, Vertical, dual row, 10p"
  rrect50% 1.65x1.65 hole 1.1: 1(-5.08,-1.27)
  round 1.65 hole 1.1: 2(-5.08,1.27) 3(-2.54,-1.27) 4(-2.54,1.27) 5(0,-1.27) 6(0,1.27) 7(2.54,-1.27) 8(2.54,1.27) 9(5.08,-1.27) 10(5.08,1.27)
  silkscreen extent -7.08,-2.62 6.5,2.62, body extent -6.35,-2.54 6.35,2.54, height 8.59
009159010061911 [mm]
  rect 1x4 smd: 1(0,0) 2(2,0) 3(4,0) 4(6,0) 5(8,0)
  rect 1x4 smd far side: 6(0,0) 7(2,0) 8(4,0) 9(6,0) 10(8,0)
  silkscreen extent -0.7,-2.3 8.7,2.5
BGA153N50P14X14_1300X1150X80N [mm]
  round 0.35 smd: A1(-3.25,3.25) A2(-2.75,3.25) A3(-2.25,3.25) A4(-1.75,3.25) A5(-1.25,3.25) A6(-0.75,3.25) A7(-0.25,3.25) A8(0.25,3.25) A9(0.75,3.25) A10(1.25,3.25) A11(1.75,3.25) A12(2.25,3.25) A13(2.75,3.25) A14(3.25,3.25) B1(-3.25,2.75) B2(-2.75,2.75) B3(-2.25,2.75) B4(-1.75,2.75) B5(-1.25,2.75) B6(-0.75,2.75) B7(-0.25,2.75) B8(0.25,2.75) B9(0.75,2.75) B10(1.25,2.75) B11(1.75,2.75) B12(2.25,2.75) B13(2.75,2.75) B14(3.25,2.75) C1(-3.25,2.25) C2(-2.75,2.25) C3(-2.25,2.25) C4(-1.75,2.25) C5(-1.25,2.25) C6(-0.75,2.25) C7(-0.25,2.25) C8(0.25,2.25) C9(0.75,2.25) C10(1.25,2.25) C11(1.75,2.25) C12(2.25,2.25) C13(2.75,2.25) C14(3.25,2.25) D1(-3.25,1.75) D2(-2.75,1.75) D3(-2.25,1.75) D4(-1.75,1.75) D12(2.25,1.75) D13(2.75,1.75) D14(3.25,1.75) E1(-3.25,1.25) E2(-2.75,1.25) E3(-2.25,1.25) E5(-1.25,1.25) E6(-0.75,1.25) E7(-0.25,1.25) E8(0.25,1.25) E9(0.75,1.25) E10(1.25,1.25) E12(2.25,1.25) E13(2.75,1.25) E14(3.25,1.25) F1(-3.25,0.75) F2(-2.75,0.75) F3(-2.25,0.75) F5(-1.25,0.75) F10(1.25,0.75) F12(2.25,0.75) F13(2.75,0.75) F14(3.25,0.75) G1(-3.25,0.25) G2(-2.75,0.25) G3(-2.25,0.25) G5(-1.25,0.25) G10(1.25,0.25) G12(2.25,0.25) G13(2.75,0.25) G14(3.25,0.25) H1(-3.25,-0.25) H2(-2.75,-0.25) H3(-2.25,-0.25) H5(-1.25,-0.25) H10(1.25,-0.25) H12(2.25,-0.25) H13(2.75,-0.25) H14(3.25,-0.25) J1(-3.25,-0.75) J2(-2.75,-0.75) J3(-2.25,-0.75) J5(-1.25,-0.75) J10(1.25,-0.75) J12(2.25,-0.75) J13(2.75,-0.75) J14(3.25,-0.75) K1(-3.25,-1.25) K2(-2.75,-1.25) K3(-2.25,-1.25) K5(-1.25,-1.25) K6(-0.75,-1.25) K7(-0.25,-1.25) K8(0.25,-1.25) K9(0.75,-1.25) K10(1.25,-1.25) K12(2.25,-1.25) K13(2.75,-1.25) K14(3.25,-1.25) L1(-3.25,-1.75) L2(-2.75,-1.75) L3(-2.25,-1.75) L12(2.25,-1.75) L13(2.75,-1.75) L14(3.25,-1.75) M1(-3.25,-2.25) M2(-2.75,-2.25) M3(-2.25,-2.25) M4(-1.75,-2.25) M5(-1.25,-2.25) M6(-0.75,-2.25) M7(-0.25,-2.25) M8(0.25,-2.25) M9(0.75,-2.25) M10(1.25,-2.25) M11(1.75,-2.25) M12(2.25,-2.25) M13(2.75,-2.25) M14(3.25,-2.25) N1(-3.25,-2.75) N2(-2.75,-2.75) N3(-2.25,-2.75) N4(-1.75,-2.75) N5(-1.25,-2.75) N6(-0.75,-2.75) N7(-0.25,-2.75) N8(0.25,-2.75) N9(0.75,-2.75) N10(1.25,-2.75) N11(1.75,-2.75) N12(2.25,-2.75) N13(2.75,-2.75) N14(3.25,-2.75) P1(-3.25,-3.25) P2(-2.75,-3.25) P3(-2.25,-3.25) P4(-1.75,-3.25) P5(-1.25,-3.25) P6(-0.75,-3.25) P7(-0.25,-3.25) P8(0.25,-3.25) P9(0.75,-3.25) P10(1.25,-3.25) P11(1.75,-3.25) P12(2.25,-3.25) P13(2.75,-3.25) P14(3.25,-3.25)
  silkscreen extent -6.4,-6.5 5.75,6.5, body extent -5.75,-6.5 5.75,6.5, height 0.8
CAP_C_1608X80 [mm] "Chip Capacitor, 2-Leads, Body 1.60x0.80mm, IPC Medium Density"
  rrect50% 0.85x0.95 smd: 1(-0.775,0) 2(0.775,0)
  silkscreen extent -0.9,-0.7 0.9,0.7, body extent -0.87,-0.48 0.87,0.48, height 0.85
CAP_C_1608X80_L [mm] "Chip Capacitor, 2-Leads, Body 1.60x0.80mm, IPC High Density"
  rrect50% 0.75x0.95 smd: 1(-0.725,0) 2(0.725,0)
  silkscreen extent -0.2,-0.5 0.2,0.5, body extent -0.87,-0.48 0.87,0.48, height 0.85
CAP_MP_2012X170 [mm] "Molded Capacitor, 2-Leads, Body 2.05x1.40mm, IPC Medium Density"
  rrect45% 1.3x1.1 smd: 1(-0.825,0) 2(0.825,0)
  silkscreen extent -1.7,-0.8 1.1,0.8, body extent -1.13,-0.77 1.13,0.77, height 1.75
CONN_5040500591_MOL [mil]
  rect 26x41 smd paste+0 mask+0: 1(118.11,-119.76) 2(59.06,-119.76) 3(0,-119.76) 4(-59.06,-119.76) 5(-118.11,-119.76)
  rect 51x73 smd paste-36.5 mask-36.5: 6(-208.86,84.57) 7(208.86,84.57)
  silkscreen extent -226,-135 266,125, body extent -237,-134 237,120, height 79
CONN_5040500991_MOL [mil]
  rect 26x41 smd paste+0 mask+0: 1(236.22,-119.76) 2(177.17,-119.76) 3(118.11,-119.76) 4(59.06,-119.76) 5(0,-119.76) 6(-59.06,-119.76) 7(-118.11,-119.76) 8(-177.17,-119.76) 9(-236.22,-119.76)
  rect 51x73 smd paste-36.5 mask-36.5: 10(-326.97,84.57) 11(326.97,84.57)
  silkscreen extent -344,-135 384,125, body extent -355,-140 355,114, height 79
CONV_TPS5430DDAR [mm]
  rrect10% 1.55x0.6 smd mask+0: 1(-2.7,1.905) 2(-2.7,0.635) 3(-2.7,-0.635) 4(-2.7,-1.905) 5(2.7,-1.905) 6(2.7,-0.635) 7(2.7,0.635) 8(2.7,1.905)
  rect 2.95x4.9 smd paste-3 mask+0: 9(0,0)
  round 0.3 hole 0.2 mask+0: 10(-0.65,1.95) 11(0.65,1.95) 12(-0.65,0.65) 13(0.65,0.65) 14(-0.65,-0.65) 15(0.65,-0.65) 16(-0.65,-1.95) 17(0.65,-1.95)
  silkscreen extent -4.17,-2.52 1.95,2.52, body extent -3,-2.45 3,2.45, height 1.7
DS90LV011AQ-Q1 [mm]
  rrect50% 1.21x0.59 smd: 1(-1.255,0.95) 2(-1.255,0) 3(-1.255,-0.95) 4(1.255,-0.95) 5(1.255,0.95)
  silkscreen extent -2.51,-1.45 0.8,1.45, body extent -1.4,-1.45 1.4,1.45, height 1.45
ESQ-126-14-G-D [mm]
  rect 1.53x1.53 / inner round 1.53 / far side rect 1.53x1.53 hole 1.02: 01(31.75,-1.27)
  round 1.53 hole 1.02: 02(31.75,1.27) 03(29.21,-1.27) 04(29.21,1.27) 05(26.67,-1.27) 06(26.67,1.27) 07(24.13,-1.27) 08(24.13,1.27) 09(21.59,-1.27) 10(21.59,1.27) 11(19.05,-1.27) 12(19.05,1.27) 13(16.51,-1.27) 14(16.51,1.27) 15(13.97,-1.27) 16(13.97,1.27) 17(11.43,-1.27) 18(11.43,1.27) 19(8.89,-1.27) 20(8.89,1.27) 21(6.35,-1.27) 22(6.35,1.27) 23(3.81,-1.27) 24(3.81,1.27) 25(1.27,-1.27) 26(1.27,1.27) 27(-1.27,-1.27) 28(-1.27,1.27) 29(-3.81,-1.27) 30(-3.81,1.27) 31(-6.35,-1.27) 32(-6.35,1.27) 33(-8.89,-1.27) 34(-8.89,1.27) 35(-11.43,-1.27) 36(-11.43,1.27) 37(-13.97,-1.27) 38(-13.97,1.27) 39(-16.51,-1.27) 40(-16.51,1.27) 41(-19.05,-1.27) 42(-19.05,1.27) 43(-21.59,-1.27) 44(-21.59,1.27) 45(-24.13,-1.27) 46(-24.13,1.27) 47(-26.67,-1.27) 48(-26.67,1.27) 49(-29.21,-1.27) 50(-29.21,1.27) 51(-31.75,-1.27) 52(-31.75,1.27)
  silkscreen extent -33.28,-2.47 34.02,2.47, body extent -33.27,-2.67 33.27,2.41, height 11.2
FLIPCHIP4_USBUL_STM [mil]
  round 10 smd paste+0 mask+0: A1(-7.87,7.87) A2(7.87,7.88) B1(-7.87,-7.88) B2(7.87,-7.87)
  Keep-Out Layer region: -33.25,-33.25 -33.25,33.25 33.25,33.25 33.25,-33.25
  body extent -16,-16 16,16, height 26
FP-4-1437565-1-MFG [mm]
  rect 2.1x1.38 smd paste+0 mask+0: 1(-4.55,2.24) 2(4.55,2.24) 3(-4.55,-2.24) 4(4.55,-2.24)
  silkscreen extent -6.27,-3.15 3.15,3.15
FP-47590-0001-MFG [mm]
  rect 0.4x1.35 smd paste+0 mask+0: 1(1.3,2.475) 2(0.65,2.475) 3(0,2.475) 4(-0.65,2.475) 5(-1.3,2.475)
  rrect100% 1.05x1.25 hole 0.85 slot 0.65 at 0 deg paste-2539.97 mask+0: 6(-2.225,2.8) 7(2.225,2.8)
  rrect100% 0.6x1.3 hole 1.3 slot 0.6 at 0 deg paste-2539.97 mask+0: 8(-4.175,-0.2) 10(4.175,-0.2)
  round 1.238 smd paste-1000 mask+0: 8(-3.988,-0.2) 10(3.988,-0.2)
  round 1.238 smd far side paste-1000 mask+0: 8(-3.988,-0.2) 10(3.988,-0.2)
  rect 2.9x1.9 smd paste+0 mask+0: 9(0,-0.2)
  Top Layer region: 3.3,0.75 4.075,0.75 4.305,0.704 4.499,0.574 4.629,0.38 4.675,0.15 4.675,0.15 4.675,-0.55 4.629,-0.78 4.499,-0.974 4.305,-1.104 4.075,-1.15 4.075,-1.15 3.3,-1.15
  Top Layer region: -3.3,-1.15 -4.075,-1.15 -4.305,-1.104 -4.499,-0.974 -4.629,-0.78 -4.675,-0.55 -4.675,-0.55 -4.675,0.15 -4.629,0.38 -4.499,0.574 -4.305,0.704 -4.075,0.75 -4.075,0.75 -3.3,0.75
  Bottom Layer region: 3.3,0.75 4.075,0.75 4.305,0.704 4.499,0.574 4.629,0.38 4.675,0.15 4.675,0.15 4.675,-0.55 4.629,-0.78 4.499,-0.974 4.305,-1.104 4.075,-1.15 4.075,-1.15 3.3,-1.15
  Bottom Layer region: -3.3,-1.15 -4.075,-1.15 -4.305,-1.104 -4.499,-0.974 -4.629,-0.78 -4.675,-0.55 -4.675,-0.55 -4.675,0.15 -4.629,0.38 -4.499,0.574 -4.305,0.704 -4.075,0.75 -4.075,0.75 -3.3,0.75
  silkscreen extent -4.1,1.13 4.1,3.82, body extent -4.77,-3.25 4.77,3.52, height 0.25
FP-BLM03-0_03-d0_3-IPC_C [mm]
  rect 0.354x0.263 smd paste+0 mask+0: 1(-0.254,0) 2(0.254,0)
  silkscreen extent -0.43,-0.57 0.43,0.57
FP-BLM18-0_15-t0_8-IPC_A [mm]
  rect 1.306x1.058 smd paste+0 mask+0: 1(-0.776,0) 2(0.776,0)
  silkscreen extent -1.43,-0.93 1.43,0.93, body extent -1.93,-1.03 1.93,1.03, height 0.25
FP-MLZ1608-IPC_A [mm]
  rect 1.206x1.058 smd paste+0 mask+0: 1(-0.826,0) 2(0.826,0)
  silkscreen extent -1.43,-0.93 1.43,0.93, body extent -1.93,-1.03 1.93,1.03, height 0.25
FP-NX3215SA-MFG [mm]
  rect 1x1.8 smd paste+0 mask+0: 1(-1.25,0) 2(1.25,0)
  silkscreen extent -0.38,-0.8 0.38,0.8, body extent -1.85,-1 1.85,1, height 0.25
FP-SOT323-3L-MFG [mm]
  rect 0.7x0.42 smd paste+0 mask+0: 1(-1,0.65) 2(-1,-0.65) 3(1,0)
  silkscreen extent -0.67,-1.1 0.67,1.1, body extent -1.45,-1.2 1.45,1.2, height 0.25
FP-TSW-102-07-G-S-MFG [mm]
  rect 1.57x1.57 hole 1.02 paste-2539.97 mask+0: 1(-1.27,0)
  round 1.57 hole 1.02 paste-2539.97 mask+0: 2(1.27,0)
  silkscreen extent -3.42,-1.34 2.73,1.34, body extent -2.83,-1.44 2.83,1.44, height 0.25